# EAGLE board ddrive-esp-deadrail-1-1 (EAGLE 7.5.0)

Size 100 x 80 mm. Coordinates in mm from the lower left corner, seen from the top.
Outline: 0,0 100,0 100,80 0,80 0,0
Copper layers (1*16): Top 0.035mm / dielectric 1.5mm / Bottom 0.035mm
Design rules "default": minimum track width 10mil, minimum drill 24mil, track to track 8mil, track to pad 8mil, pad to pad 8mil, via to via 8mil, smd to smd 8mil, copper to edge 40mil, drill to drill 8mil, minimum pad ring 10mil, minimum via ring 8mil, stop-mask expansion 4mil, vias tented up to drill 0mil, thermal gap 10mil

## Footprints (pad centres in the part's own frame; a part is rotated, then mirrored left to right if it is on the bottom)
1X02 = drill 1.016 long: 1 -1.27,0; 2 1.27,0
1X03 = drill 1.016 long: 1 -2.54,0; 2 0,0; 3 2.54,0
SOT23 = smd 1 x 1.4: 1 -0.95,-1.1; 2 0.95,-1.1; 3 0,1.1
R0805 = smd 1.3 x 1.5: 1 -0.95,0; 2 0.95,0
ESP12-HUZZAH = drill 0.8 long: 0 10.16,2.54; 2 10.16,0; 3V3 10.16,-5.08; 4 10.16,5.08; 5 10.16,7.62; 12 -10.16,0; 13 -10.16,-2.54; 14 -10.16,2.54; 15 10.16,-2.54; 16 -10.16,5.08; A -10.16,10.16; EN -10.16,7.62; GND -10.16,-10.16; GND2 10.16,-10.16; LDO_EN 10.16,-7.62; RST -10.16,12.7; RX 10.16,10.16; TX 10.16,12.7; V+ -10.16,-5.08; VBAT -10.16,-7.62
TSOT-26 = smd 0.7 x 1: 1 -0.95,-1.1; 2 0,-1.1; 3 0.95,-1.1; 4 0.95,1.1; 5 0,1.1; 6 -0.95,1.1
JST-PINHDR = drill 0.8 long: GND -1,0; VBAT 1,0
POLOLU-REGULATOR = drill 0.8 long: GND 4.064,1.27; VIN 6.604,1.27; VOUT 1.524,1.27

## Placement (x,y rotation side)
JP1  [1X02]  13.97,21.59 90 top
JP2  [1X03]  2.54,20.32 270 top
JP3  [1X03]  8.89,20.32 270 top
Q1  BSS123  [SOT23]  41.91,11.43 90 top
Q2  BSS123  [SOT23]  31.75,10.16 90 top
Q3  BSS123  [SOT23]  40.64,6.35 90 top
Q4  BSS123  [SOT23]  35.56,6.35 90 top
R1  5k  [R0805]  38.1,19.05 0 top
R2  5k  [R0805]  26.67,16.51 90 top
R3  10k  [R0805]  36.83,13.97 270 top
R4  10k  [R0805]  26.67,11.43 270 top
R5  160  [R0805]  5.71,17.78 0 top
R6  160  [R0805]  5.71,22.86 0 top
R7  47k  [R0805]  13.97,6.35 180 top
R8  270k  [R0805]  10.16,6.35 180 top
U$1  ESP12-HUZZAH  [ESP12-HUZZAH]  36.83,12.7 90 bottom
U$2  DMG6601-LVT  [TSOT-26]  40.64,15.24 180 top
U$3  DMG6601-LVT  [TSOT-26]  31.75,15.24 180 top
U$4  JST-PINHD  [JST-PINHDR]  3.81,3.81 270 top
U$5  POLOLU-VREG12  [POLOLU-REGULATOR]  16.51,1.27 0 bottom

## Library data of the parts
JP1-JP3 = pinhead
Q1-Q4 = transistor-small-signal
R1-R8 = rcl
U$1-U$5 = trainlib

## Nets
+3V3: JP3.2 U$1.3V3
+12V: JP2.2 R1.2 R2.2 U$2.2 U$3.2 U$5.VOUT
GND: Q1.2 Q2.2 Q3.2 Q4.2 U$1.GND2 U$2.5 U$3.5
GND1: R8.2 U$1.GND U$4.GND U$5.GND
N$1: JP1.1 U$2.4 U$2.6
N$2: R1.1 R3.1 U$2.3
N$3: Q2.3 R4.2
N$4: R2.1 R4.1 U$3.3
N$5: Q1.1 U$1.4
N$6: Q1.3 R3.2
N$7: JP1.2 U$3.4 U$3.6
N$8: U$1.0 U$2.1
N$9: Q2.1 U$1.2
N$10: U$1.15 U$3.1
N$11: Q3.1 U$1.14
N$12: Q4.1 U$1.12
N$13: JP2.3 Q3.3 R5.1
N$14: JP2.1 Q4.3 R6.1
N$15: JP3.3 R5.2
N$16: JP3.1 R6.2
N$19: R7.2 R8.1 U$1.A
V+: U$1.V+
VBAT: R7.1 U$1.VBAT U$4.VBAT U$5.VIN

## Tracks (layer width: path | path; a pad name or v marks a point on that pad's centre or on a via)
+3V3  (1 unrouted)
+12V  (5 unrouted)
GND  (6 unrouted)
GND1  (3 unrouted)
N$1  (2 unrouted)
N$2  (2 unrouted)
N$3  (1 unrouted)
N$4  (2 unrouted)
N$5  (1 unrouted)
N$6  (1 unrouted)
N$7  (2 unrouted)
N$8  (1 unrouted)
N$9  (1 unrouted)
N$10  (1 unrouted)
N$11  (1 unrouted)
N$12  (1 unrouted)
N$13  (2 unrouted)
N$14  (2 unrouted)
N$15  (1 unrouted)
N$16  (1 unrouted)
N$19  (2 unrouted)
VBAT  (3 unrouted)